# EAGLE board speed sensor (EAGLE 9.5.2)
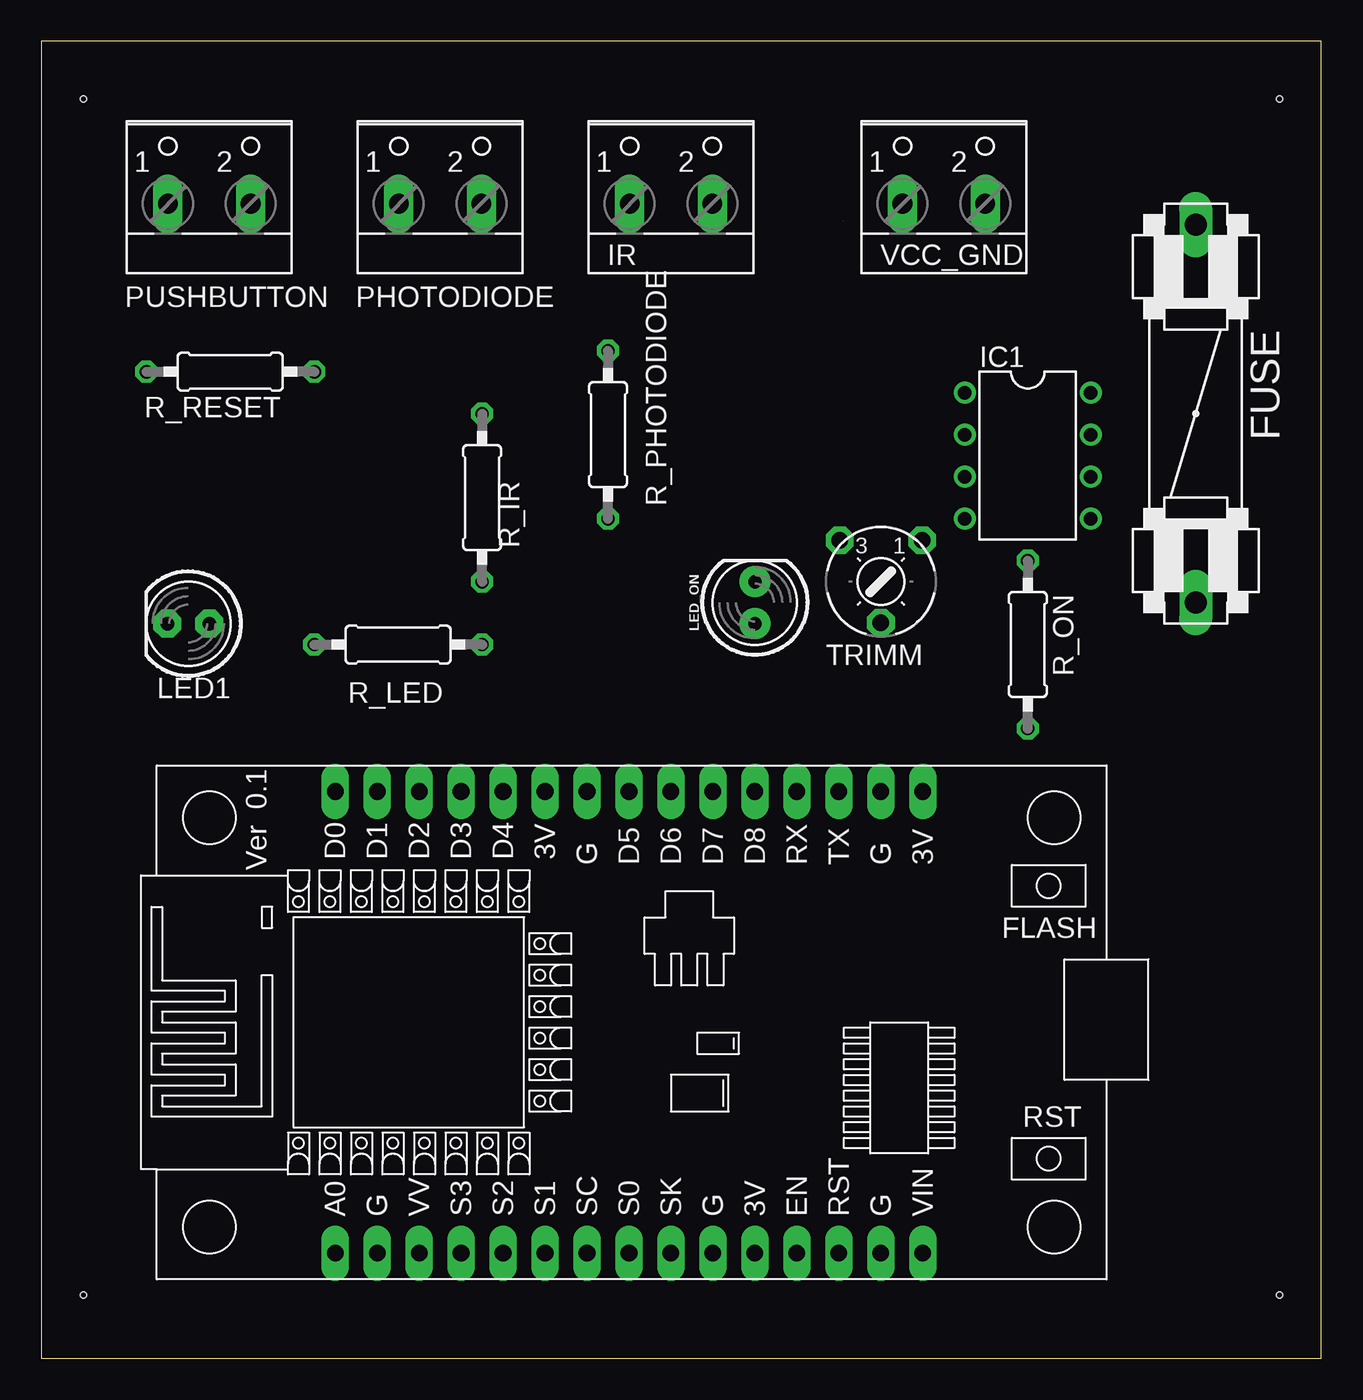
[diagram p0: board, top side]
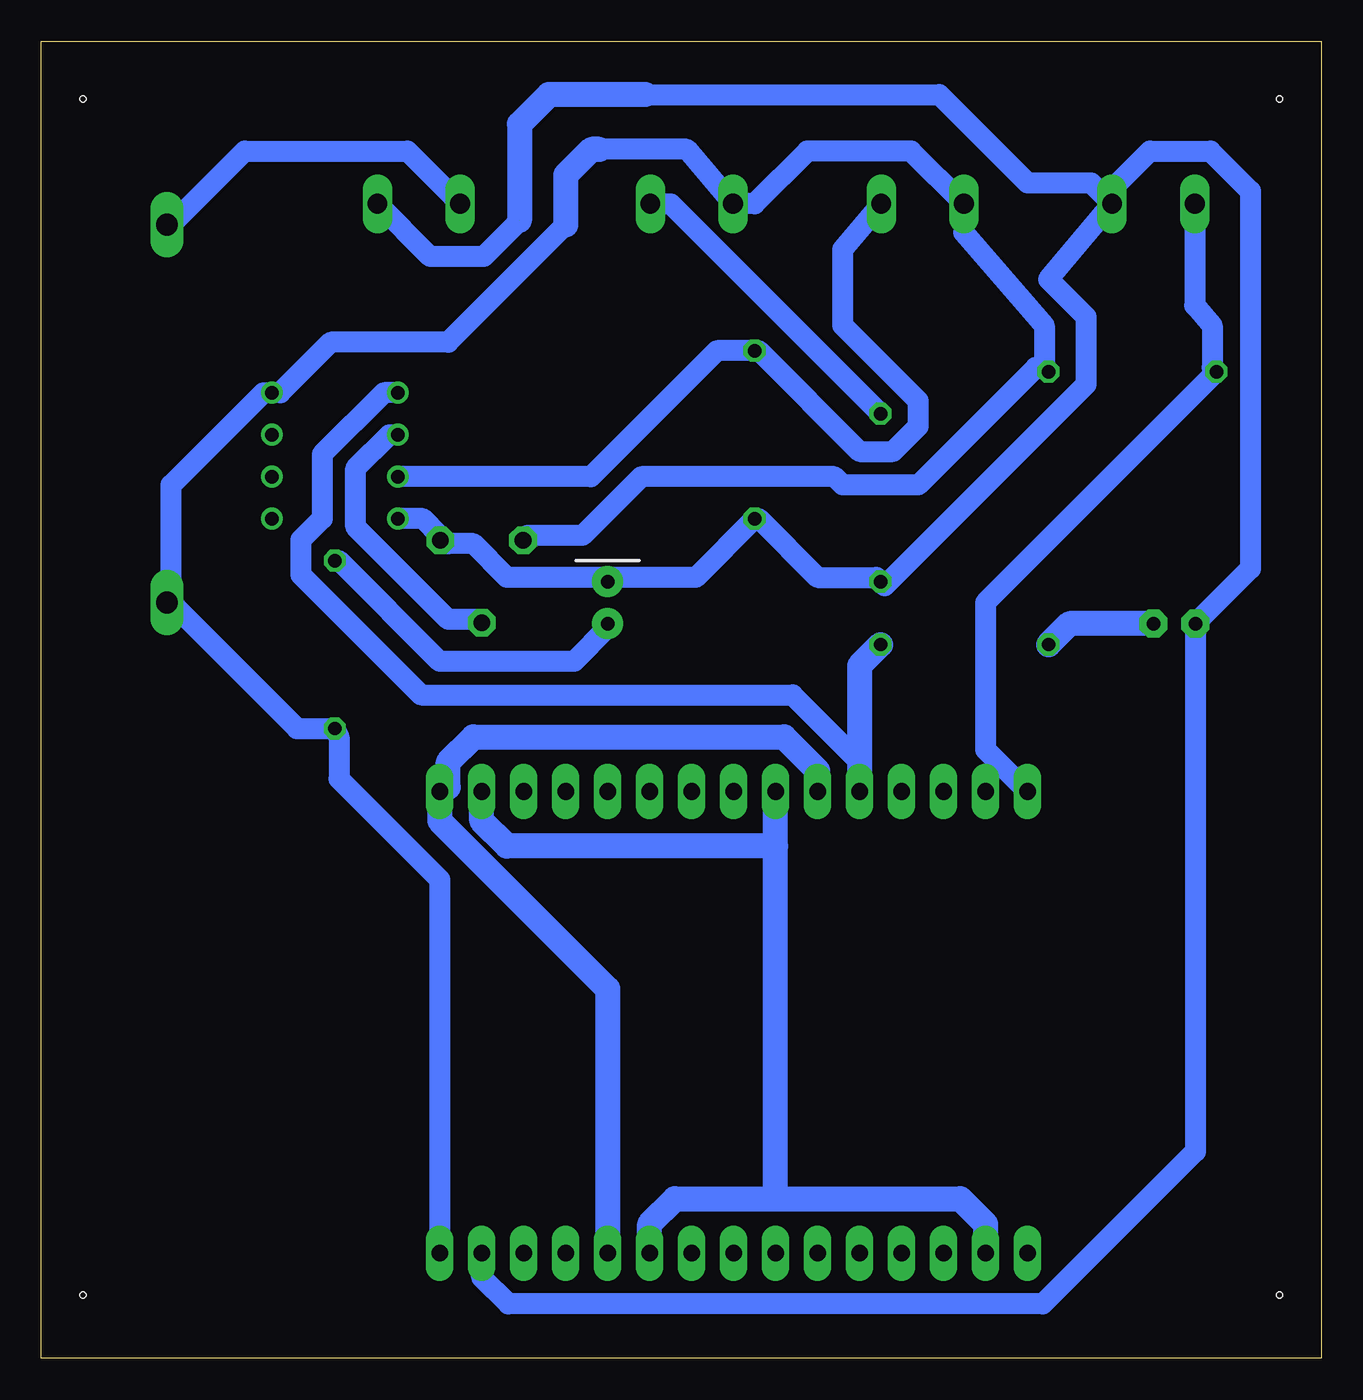
[diagram p1: board, bottom side, seen from below]

Size 77.45 x 79.68 mm. Coordinates in mm from the lower left corner, seen from the top.
Outline: 0,0 77.45,0 77.45,79.68 0,79.68 0,0
Copper layers (1*16): Top 0.035mm / dielectric 1.5mm / Bottom 0.035mm
Design rules "default *": minimum track width 6mil, minimum drill 0.35mm, track to track 6mil, track to pad 6mil, pad to pad 6mil, via to via 6mil, smd to smd 6mil, copper to edge 4mil, drill to drill 6mil, minimum pad ring 10mil, minimum via ring 8mil, stop-mask expansion 4mil, vias tented up to drill 0mil, thermal gap 10mil
Net classes: 0 default: width 1.27 mm, clearance 0.762 mm; 1 vcc: width 1.524 mm, clearance 0.762 mm to class 0; 2 gnd: width 1.524 mm, clearance 0.762 mm to class 0
Holes 0.35 mm at 74.93,3.81 2.54,3.81 74.93,76.2 2.54,76.2

## Footprints (pad centres in the part's own frame; a part is rotated, then mirrored left to right if it is on the bottom)
FUSE = drill 1.321 long: 1 -11.43,0; 2 11.43,0
DIL08 = drill 0.813 pad 1.27: 1 -3.81,-3.81; 2 -1.27,-3.81; 3 1.27,-3.81; 4 3.81,-3.81; 5 3.81,3.81; 6 1.27,3.81; 7 -1.27,3.81; 8 -3.81,3.81
W237-102 = drill 1.194 long: 1 -2.5,-1.27; 2 2.5,-1.27
LED5MM = drill 0.813 pad 1.676 octagon: A -1.27,0; K 1.27,0
LED_5MM = drill 0.813 pad 1.88: A -1.27,0; K 1.27,0
0207/10 = drill 0.813 octagon: 1 -5.08,0; 2 5.08,0
6MM = drill 1 pad 1.676 octagon: A -2.5,-2.5; E 2.5,-2.5; S 0,2.5
NODEMCU = drill 1 pad 1.676 long: 1 -13.97,17.78; 2 -13.97,15.24; 3 -13.97,12.7; 4 -13.97,10.16; 5 -13.97,7.62; 6 -13.97,5.08; 7 -13.97,2.54; 8 -13.97,0; 9 -13.97,-2.54; 10 -13.97,-5.08; 11 -13.97,-7.62; 12 -13.97,-10.16; 13 -13.97,-12.7; 14 -13.97,-15.24; 15 -13.97,-17.78; 16 13.97,-17.78; 17 13.97,-15.24; 18 13.97,-12.7; 19 13.97,-10.16; 20 13.97,-7.62; 21 13.97,-5.08; 22 13.97,-2.54; 23 13.97,0; 24 13.97,2.54; 25 13.97,5.08; 26 13.97,7.62; 27 13.97,10.16; 28 13.97,12.7; 29 13.97,15.24; 30 13.97,17.78

## Placement (x,y rotation side)
FUSE  1 amp  [FUSE]  69.85,57.15 270 top
IC1  LM358N  [DIL08]  59.69,54.61 270 top
IR  [W237-102]  38.1,71.12 0 top
LED1  [LED5MM]  8.89,44.45 180 top
LED_ON  [LED_5MM]  43.18,45.72 90 top
PHOTODIODE  [W237-102]  24.13,71.12 0 top
PUSHBUTTON  [W237-102]  10.16,71.12 0 top
R_IR  100  [0207/10]  26.67,52.07 90 top
R_LED  330  [0207/10]  21.59,43.18 0 top
R_ON  330  [0207/10]  59.69,43.18 270 top
R_PHOTODIODE  10k  [0207/10]  34.29,55.88 90 top
R_RESET  10k  [0207/10]  11.43,59.69 180 top
TRIMM  10k  [6MM]  50.8,46.99 180 top
U$1  NODEMCU  [NODEMCU]  35.56,20.32 90 top
VCC_GND  [W237-102]  54.61,71.12 0 top

## Library data of the parts
FUSE = special
IC1 = linear
IR PHOTODIODE PUSHBUTTON VCC_GND = con-wago-500; MPN: 237-102; OC_FARNELL: unknown; OC_NEWARK: 70K9898
LED1 TRIMM = adafruit
LED_ON = SparkFun-LED
R_IR R_LED R_ON R_PHOTODIODE R_RESET = rcl; SPICEPREFIX: R
U$1 = nodemcu

## Nets
3V [vcc]: U$1.11 U$1.16 U$1.25
GND: IC1.4 LED1.K LED_ON.K PUSHBUTTON.2 R_IR.1 R_PHOTODIODE.1 TRIMM.A U$1.14 VCC_GND.2
N$1: LED1.A R_LED.1
N$2: IR.2 R_IR.2
N$3 [vcc]: U$1.2 U$1.10 U$1.17 U$1.24
N$4: IC1.3 PHOTODIODE.2 R_PHOTODIODE.2
N$6: IC1.2 TRIMM.S
N$8: IC1.1 R_LED.2 U$1.26
N$9: PUSHBUTTON.1 R_RESET.2 U$1.30
N$10: LED_ON.A R_ON.1
N$13: FUSE.2 IC1.8 IR.1 PHOTODIODE.1 R_ON.2 R_RESET.1 TRIMM.E U$1.15
VCC: FUSE.1 VCC_GND.1

## Tracks (layer width: path | path; a pad name or v marks a point on that pad's centre or on a via)
3V
  Bottom 1.524: U$1.11 43.18,22.35 53.34,32.51 U$1.16 52.83,34.54 52.83,36.07 51.31,37.59 32.51,37.59 30.48,35.56 U$1.25
GND  (1 unrouted)
  Bottom 1.27: IC1.4 54.36,50.8 53.34,49.78 TRIMM.A 52.83,49.28 51.31,49.28 49.28,47.24 43.69,47.24 LED_ON.K 42.93,47.24 37.85,47.24 R_PHOTODIODE.1 34.04,50.8 30.48,47.24 26.92,47.24 R_IR.1 26.42,46.74 14.22,58.93 14.22,62.99 16.51,65.28 PUSHBUTTON.2 | 40.89,76.45 23.11,76.45 17.78,71.12 13.93,71.12 PUSHBUTTON.2 | U$1.14 50.8,4.89 49.19,3.28 16.85,3.28 7.62,12.51 LED1.K 4.29,47.78 4.29,70.62 6.71,73.04 10.37,73.04 12.66,70.74 PUSHBUTTON.2 | 48.51,68.83 50.69,66.66 53.92,66.66 VCC_GND.2
  Bottom 1.524: 40.89,76.45 46.74,76.45 48.51,74.68 48.51,68.84 48.52,68.84
N$1
  Bottom 1.524: LED1.A 15.24,44.45 R_LED.1
N$2
  Bottom 1.27: IR.2 39.37,69.85 R_IR.2
N$3
  Bottom 1.524: U$1.2 20.32,8.13 21.84,9.65 33.02,9.65 | 33.02,9.65 39.12,9.65 40.64,8.13 U$1.10 | 33.02,9.65 33.02,30.99 | 33.02,30.99 U$1.24 | U$1.17 50.8,32.51 49.28,30.99 33.02,30.99
N$4
  Bottom 1.27: IC1.3 44.2,53.34 36.58,60.96 R_PHOTODIODE.2 34.04,60.96 27.94,54.86 25.91,54.86 24.38,56.39 24.38,57.91 28.96,62.48 28.96,67.09 PHOTODIODE.2
N$6
  Bottom 1.27: IC1.2 56.39,55.88 58.42,53.85 58.42,50.29 52.83,44.7 50.8,44.7 TRIMM.S
N$8
  Bottom 1.27: IC1.1 56.72,58.42 60.45,54.69 60.45,50.8 61.75,49.5 61.75,47.41 54.47,40.13 32,40.13 27.94,36.07 U$1.26
  Bottom 1.524: R_LED.2 27.94,41.91 U$1.26
N$9
  Bottom 1.27: PUSHBUTTON.1 7.66,63.71 6.6,62.48 6.6,59.94 R_RESET.2 20.32,45.72 20.32,36.83 U$1.30
N$10
  Bottom 1.27: R_ON.1 59.44,48.26 53.34,42.16 45.21,42.16 43.18,44.2 LED_ON.A
N$13
  Bottom 1.27: 16.76,59.94 16.76,62.48 21.63,68.12 PHOTODIODE.1 24.82,73.04 31.1,73.04 34.29,69.85 IR.1 38.38,73.15 43.69,73.15 | 16.76,59.94 R_RESET.1 | 16.76,59.94 17.27,59.94 24.38,52.83 28.96,52.83 29.46,53.34 41.15,53.34 44.7,49.78 48.01,49.78 TRIMM.E | U$1.15 53.34,28.96 59.44,35.05 59.44,37.59 R_ON.2 61.98,38.1 69.6,45.72 FUSE.2 69.6,46.23 69.6,52.83 64.01,58.42 IC1.8 62.99,58.42 59.94,61.47 52.83,61.47 45.72,68.58
  Bottom 1.524: 43.69,73.15 44.15,73.15 45.72,71.59 45.72,68.58
VCC
  Bottom 1.27: FUSE.1 69.6,68.58 65.14,73.04 55.3,73.04 VCC_GND.1